# Altium PCB sensor_9e.PcbDoc
Units mm, origin at the board's own origin, x right, y up, seen from the top; angles counter-clockwise.
Board outline 100 x 105 mm, 2 copper layers (Top Layer, Bottom Layer); 1 components, 10 nets, 10 pads, 10 vias.
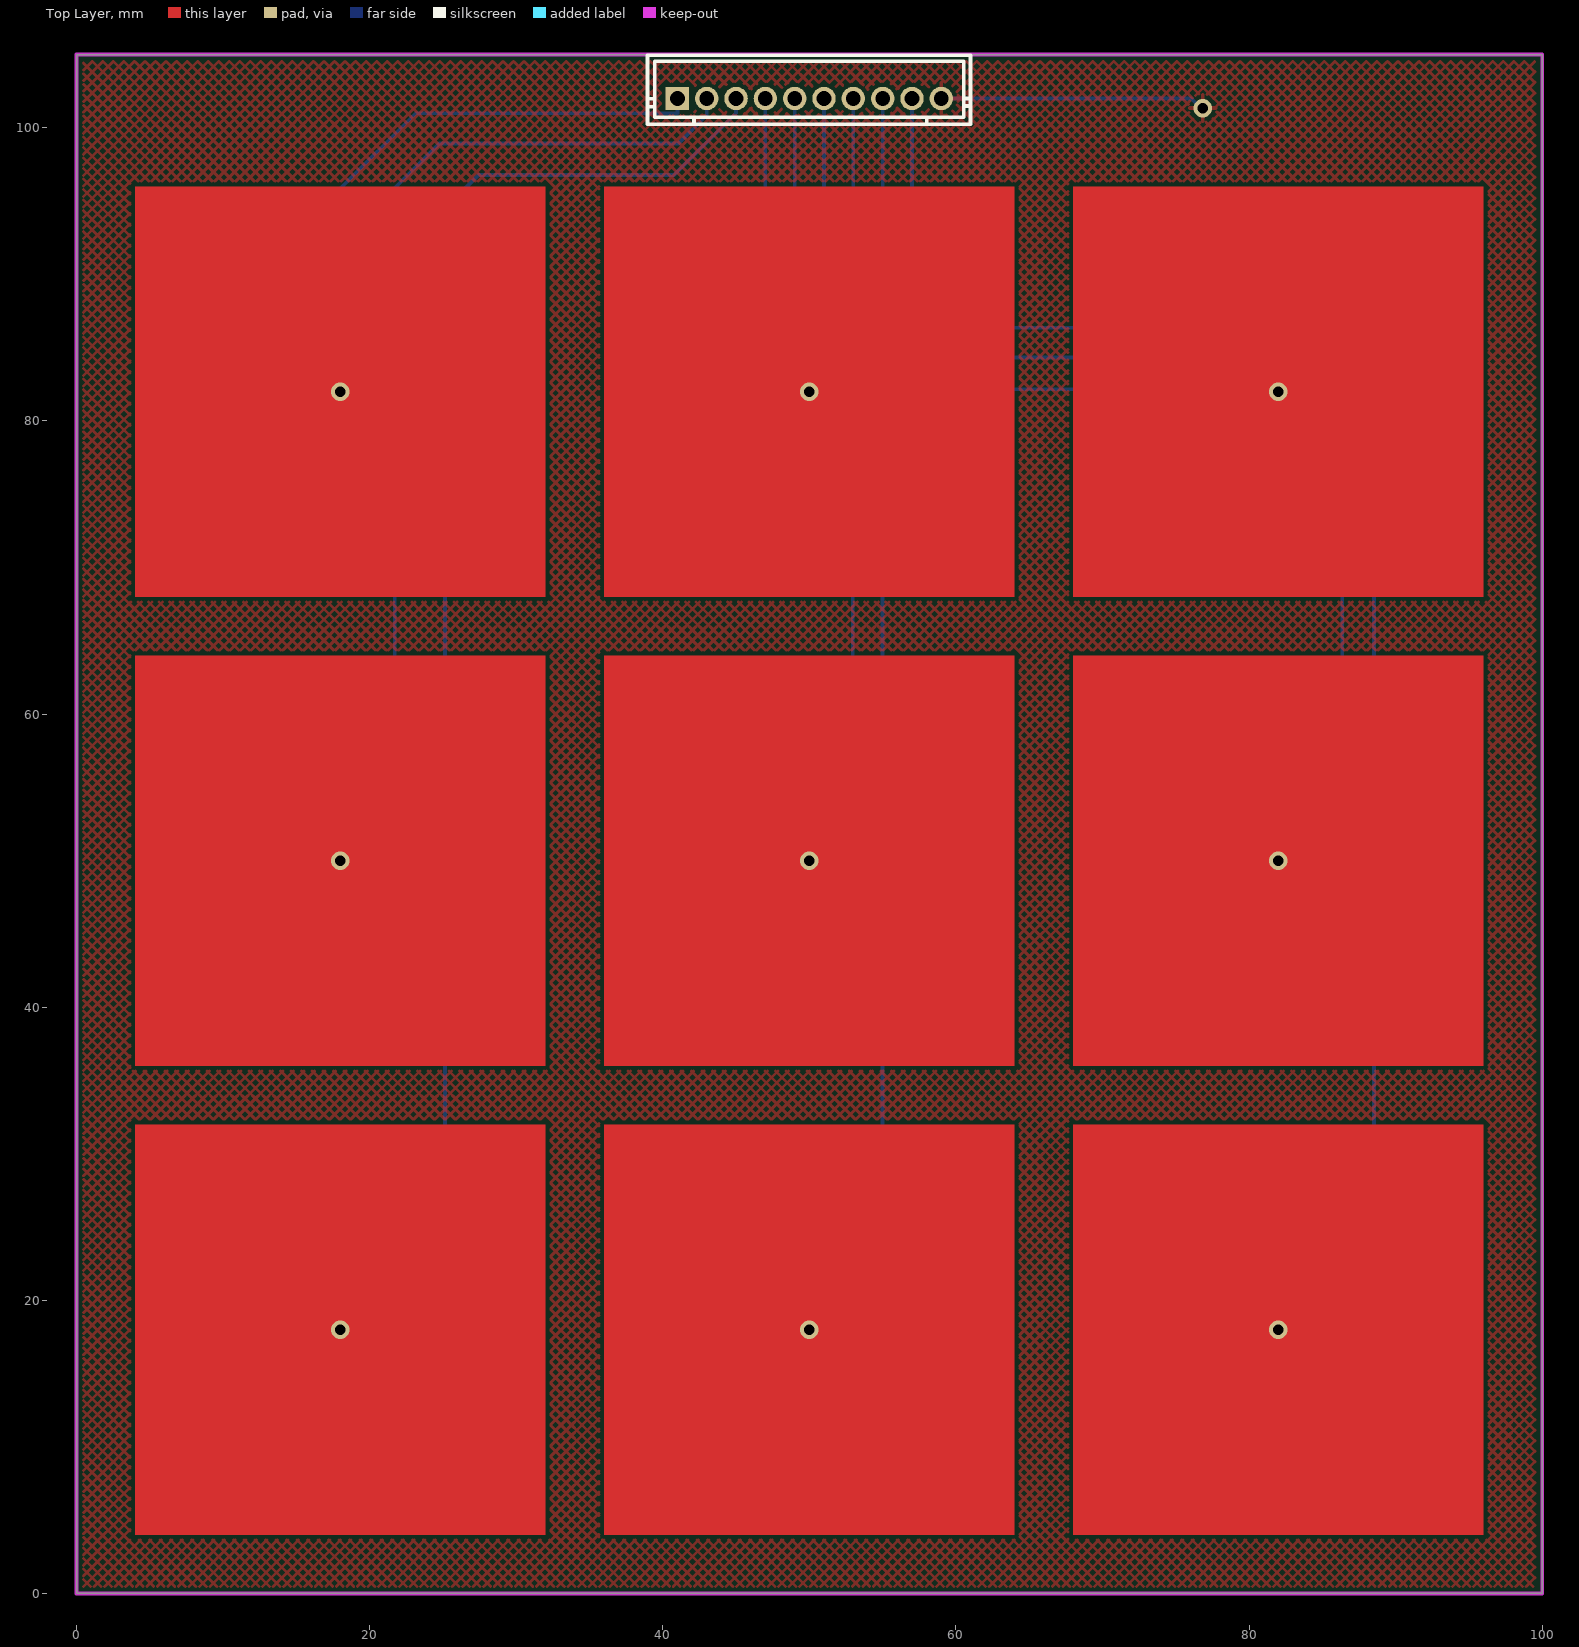
[diagram p0: Top Layer view]
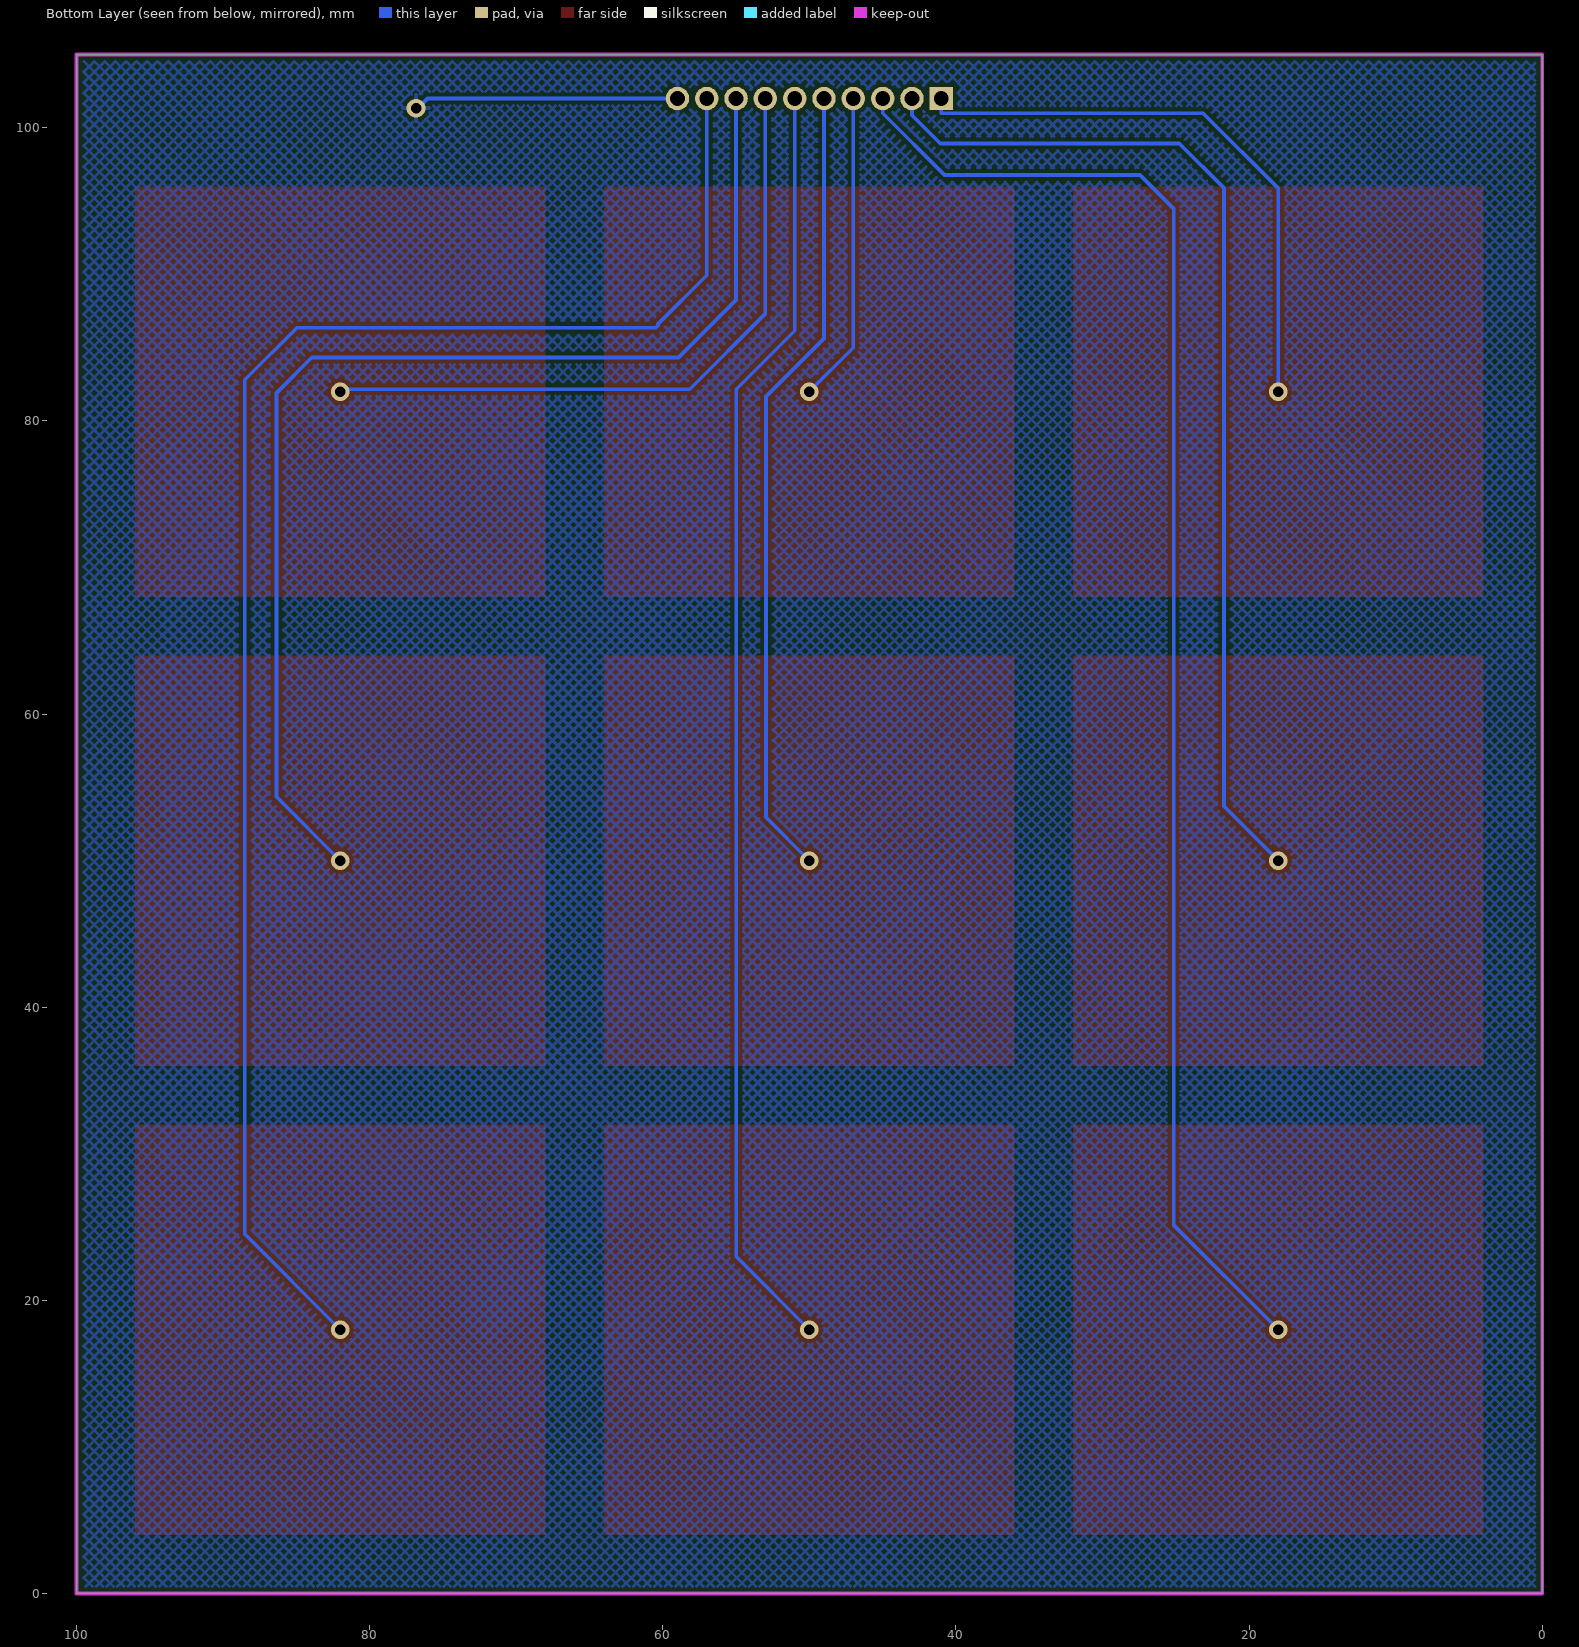
[diagram p1: Bottom Layer view, seen from below]

## Layer stack, top to bottom
Top Solder: solder mask 0.0102, Solder Resist, Dk 3.5
Top Layer: signal copper 0.0356
Dielectric 1: dielectric 0.32, FR-4, Dk 4.8
Bottom Layer: signal copper 0.0356
Bottom Solder: solder mask 0.0102, Solder Resist, Dk 3.5

## Board outline
0,0 0,105 100,105 100,0

## Design rules (kind name [scope] priority, off if disabled: settings)
Clearance [All] p1: gap=0.254 ignorepadtopadclearanceinfootprint=FALSE
MinimumSolderMaskSliver [All] p1: minsoldermaskwidth=0.15
PolygonConnect [All] p1: connectstyle=Relief reliefconductorwidth=0.254 reliefentries=4 polygonreliefangle="90 Angle" airgapwidth=0.254
RoutingVias [All] p1: holewidth=0.711 width=1.27 viastyle="Through Hole" minholewidth=0.711 minwidth=1.27 maxholewidth=0.711 maxwidth=1.27
SolderMaskExpansion [All] p1: expansion=0.102 istentingtop=FALSE
Width [All] p1: maxlimit=0.254 minlimit=0.254 preferedwidth=0.254
29 further rules are at their usual default settings.

## Components (designator, comment, footprint, x,y, rotation, side; value= is the part's Value field where it differs from the comment)
? "" CONN-TH_10P-P2.00_HCTL_PH-10A 50,102 r0 top

## Footprints (in the part's own frame and the unit in brackets; to place one, negate y for a bottom-side part, rotate by r counter-clockwise, add the part's x,y. Pads: shape width x height; smd on the part's side, far side on the other; paste and mask are expansions set on the pad)
CONN-TH_10P-P2.00_HCTL_PH-10A [mm]
  rect 1.6x1.6 hole 1: 1(-9,0)
  round 1.6 hole 1: 2(-7,0) 3(-5,0) 4(-3.001,0) 5(-0.999,0) 6(0.999,0) 7(3.001,0) 8(5,0) 9(7.002,0) 10(9,0)
  silkscreen extent -11.05,-1.75 11,2.95

## Via types
v1: diameter 1.27, hole 0.711, Top Layer to Bottom Layer, 10 vias

## Nets (pads, with @x,y where several pads share a name; then routed paths per layer and width w, separated by ;. In a path a pad name is that pad's centre, name@x,y a point inside that pad or via, vN(x,y) a via of type N, cw(c..) or ccw(c..) an arc to the next point about the centre after c; other vN are vias at no path point)
GND: ?.10 | length 18.1
  Bottom Layer w0.254: ?.10 76.052,102 76.706,101.346 v1(76.835,101.346)
IN1: ?.1 | length 40
  Bottom Layer w0.254: v1(18,82) 18,95.851 23.149,101 41,101 ?.1
IN2: ?.2 | length 71.9
  Bottom Layer w0.254: v1(18,50) 21.717,53.717 21.717,95.885 24.765,98.933 41.071,98.933 43,100.861 ?.2
IN3: ?.3 | length 103
  Bottom Layer w0.254: v1(18,18) 25.146,25.146 25.146,94.488 27.432,96.774 40.774,96.774 45,101 ?.3
IN4: ?.4 | length 21.2
  Bottom Layer w0.254: ?.4 46.999,85.001 v1(50,82)
IN5: ?.5 | length 54.9
  Bottom Layer w0.254: ?.5 49.001,85.619 52.959,81.661 52.959,52.959 v1(50,50)
IN6: ?.6 | length 87.7
  Bottom Layer w0.254: v1(50,18) 54.991,22.991 54.991,82.169 50.999,86.161 ?.6
IN7: ?.7 | length 45.9
  Bottom Layer w0.254: ?.7 53.001,87.334 58.166,82.169 81.831,82.169 v1(82,82)
IN8: ?.8 | length 81.5
  Bottom Layer w0.254: ?.8 55,88.256 58.928,84.328 83.947,84.328 86.36,81.915 86.36,54.36 v1(82,50)
IN9: ?.9 | length 114.1
  Bottom Layer w0.254: ?.9 57.002,89.937 60.325,86.614 60.325,86.509 60.474,86.36 84.963,86.36 88.519,82.804 88.519,24.519 v1(82,18)

## Polygon pours and split planes (outlines as drawn)
GND on Bottom Layer "GND_L02_P001" (hatched 45Degree grid 0.508 track 0.203, pour order 1): 0,105.029 100.076,105.029 100.076,0 0,0
GND on Top Layer "GND_L01_P003" (hatched 45Degree grid 0.508 track 0.203, pour order 3): 0,104.902 0.127,105.029 99.949,105.029 99.949,0 0,0

## Keep-outs
Keep-Out Layer:
  the board outline again, w0.254

## Other copper
Top Layer:
  rectangle net IN7: 68,68 96,96
  rectangle net IN4: 36,68 64,96
  rectangle net IN1: 4,68 32,96
  rectangle net IN2: 4,36 32,64
  rectangle net IN5: 36,36 64,64
  rectangle net IN8: 68,36 96,64
  rectangle net IN9: 68,4 96,32
  rectangle net IN6: 36,4 64,32
  rectangle net IN3: 4,4 32,32